# EAGLE board Schematic v32 (EAGLE 9.7.0)
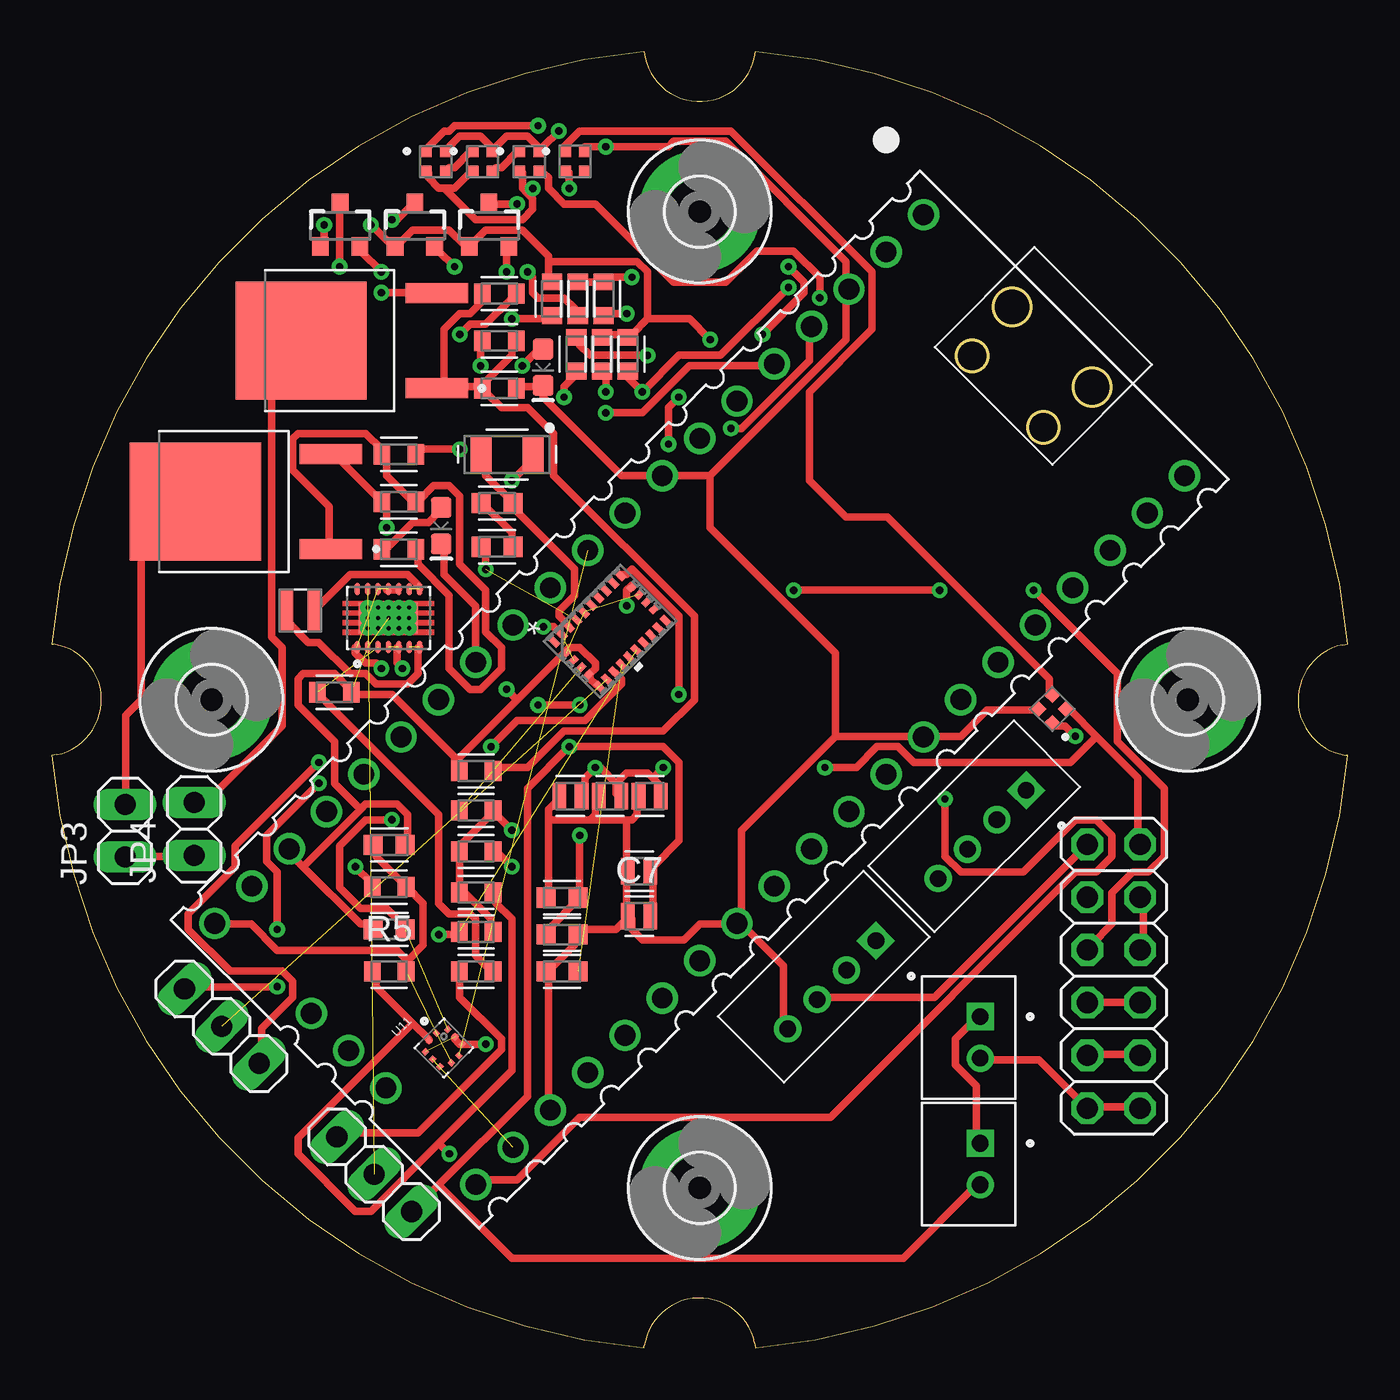
[diagram p0: board, top side]
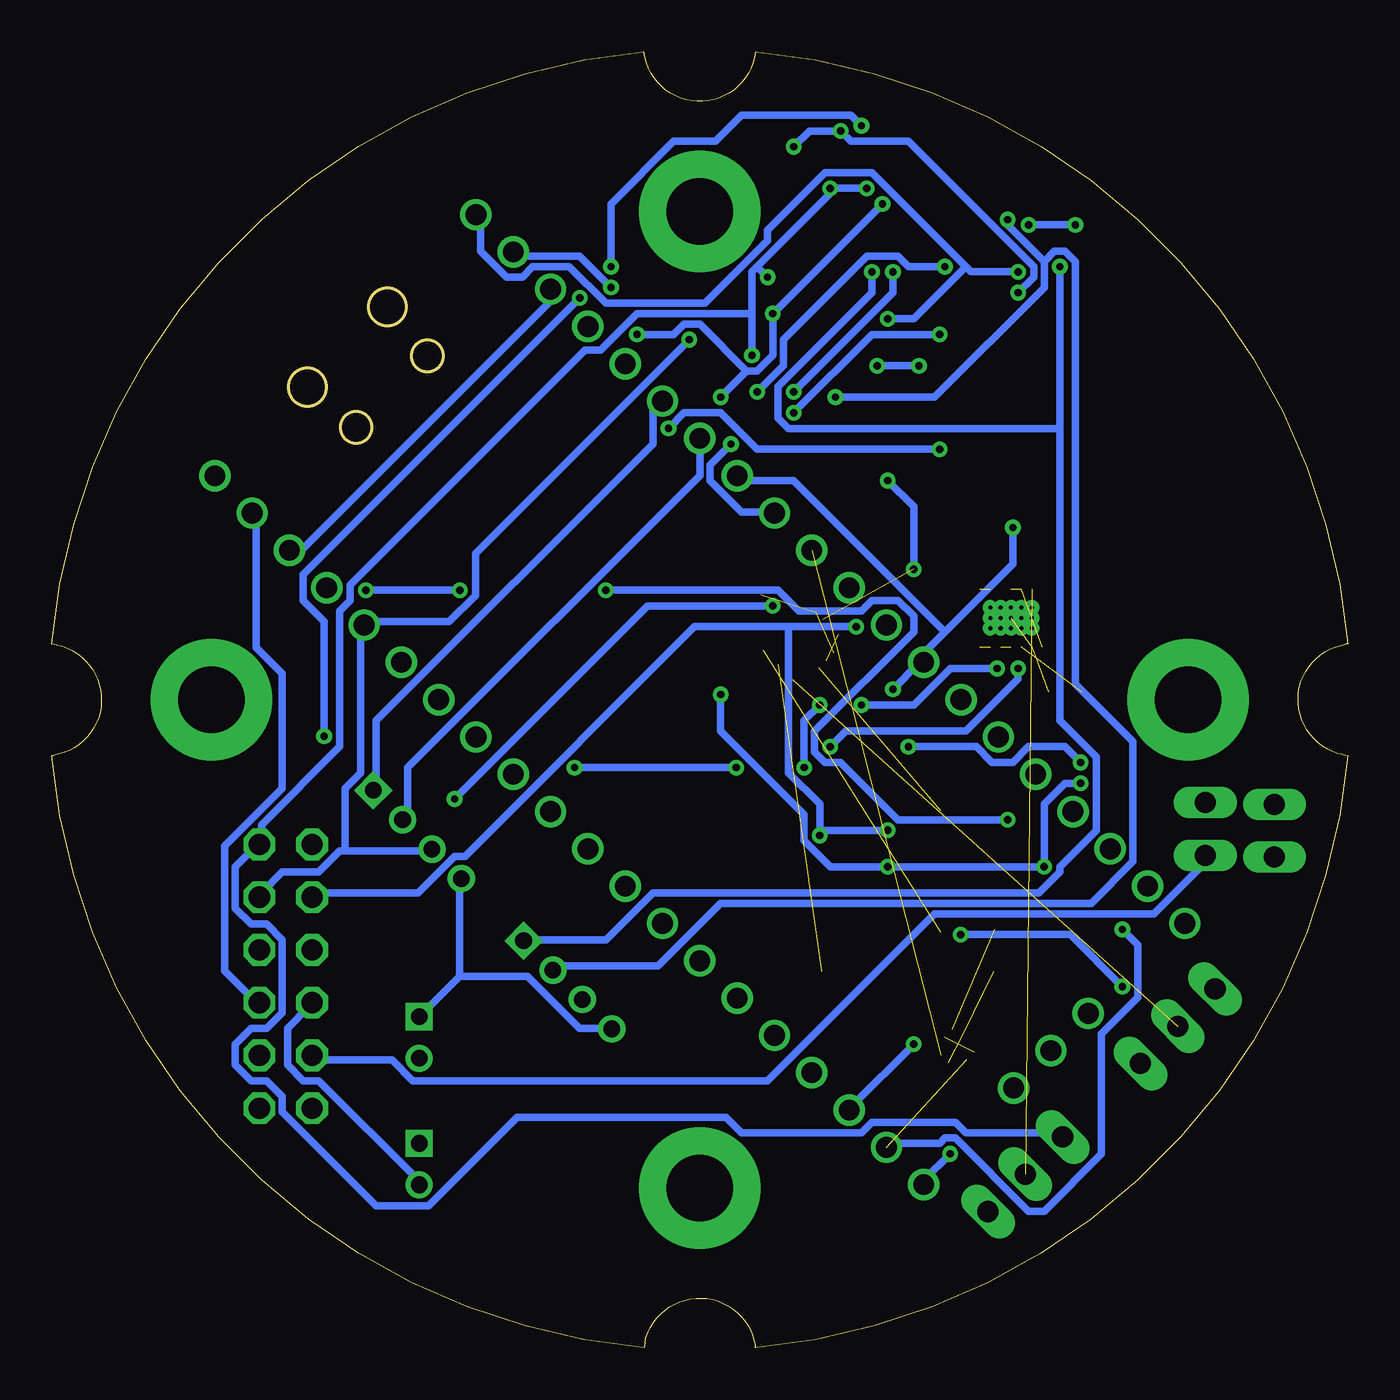
[diagram p1: board, bottom side, seen from below]

Size 62.37 x 62.37 mm. Coordinates in mm from the lower left corner, seen from the top.
Outline: 28.5,62.37 arc80 0,33.87 0.07,33.86 arc-160 0.23,28.54 0,28.5 arc80 28.5,0 28.51,0.07 arc-160 33.83,0.23 33.87,0 arc80 62.37,28.5 62.29,28.51 arc-160 62.14,33.83 62.37,33.87 arc80 33.87,62.37 arc-167 28.5,62.37
Outline: circle at 47.72,44.3 radius 0.75
Outline: circle at 50.08,46.23 radius 0.9
Outline: circle at 44.29,47.73 radius 0.75
Outline: circle at 46.22,50.09 radius 0.9
Copper layers (1+2*15+16): Top 0.035mm / dielectric 1.5mm / Route2 0.035mm / dielectric 0.15mm / Route15 0.035mm / dielectric 0.2mm / Bottom 0.035mm
Design rules "default *": minimum track width 0.35mm, minimum drill 0.35mm, track to track 6mil, track to pad 6mil, pad to pad 6mil, via to via 6mil, smd to smd 6mil, copper to edge 40mil, drill to drill 6mil, minimum pad ring 10mil, minimum via ring 8mil, stop-mask expansion 4mil, vias tented up to drill 0mil, thermal gap 10mil

## Footprints (pad centres in the part's own frame; a part is rotated, then mirrored left to right if it is on the bottom)
CAPC1608X85 = smd 0.921 x 0.97: 1 -0.775,0; 2 0.775,0
CAPC1110X102 = smd 0.663 x 1.282: 1 -0.539,0; 2 0.539,0
LED-0603 = smd 1 x 1: A -0.877,0; C 0.877,0
3,2-PAD = drill 3.2 pad 5.842: B3,2 0,0
JST_B4B-PH-KL(LF)(SN) = drill 0.8 square: 1 3,-0.55 | drill 0.8: 2 1,-0.55; 3 -1,-0.55; 4 -3,-0.55
JST_B2B-PH-K-S(LF)(SN) = drill 0.8 square: 1 1,-0.55 | drill 0.8: 2 -1,-0.55
1X03 = drill 1.016 long: 1 -2.54,0; 2 0,0; 3 2.54,0
1X02 = drill 1.016 long: 1 -1.27,0; 2 1.27,0
2X06 = drill 1.016 octagon: 1 -6.35,-1.27; 2 -6.35,1.27; 3 -3.81,-1.27; 4 -3.81,1.27; 5 -1.27,-1.27; 6 -1.27,1.27; 7 1.27,-1.27; 8 1.27,1.27; 9 3.81,-1.27; 10 3.81,1.27; 11 6.35,-1.27; 12 6.35,1.27
INDUCTOR_2X2 = smd 0.65 x 2: P$1 -0.675,0; P$2 0.675,0
SOT23-3 = smd 0.8 x 0.9: 1 -0.95,-1; 2 0.95,-1; 3 0,1.1
DPAK228P994X240-4N = smd 0.97 x 3.02: 1 -2.286,-4.09; 3 2.286,-4.09 | smd 5.67 x 6.32: 4 0,2.44
RESC1608X60 = smd 0.799 x 0.974: 1 -0.815,0; 2 0.815,0
QFN_BNO055_BOS = smd 0.305 x 0.533: 1 -2.25,1.537; 6 -2.25,-1.537; 7 -1.75,-1.537; 8 -1.25,-1.537; 9 -0.75,-1.537; 10 -0.25,-1.537; 11 0.25,-1.537; 12 0.75,-1.537; 13 1.25,-1.537; 14 1.75,-1.537; 15 2.25,-1.537; 20 2.25,1.537; 21 1.75,1.537; 22 1.25,1.537; 23 0.75,1.537; 24 0.25,1.537; 25 -0.25,1.537; 26 -0.75,1.537; 27 -1.25,1.537; 28 -1.75,1.537 | smd 0.432 x 0.305: 2 -2.235,0.75; 3 -2.235,0.25; 4 -2.235,-0.25; 5 -2.235,-0.75; 16 2.235,-0.75; 17 2.235,-0.25; 18 2.235,0.25; 19 2.235,0.75
PICO-PKG-TH = drill 1: 1 -8.89,24.13; 2 -8.89,21.59; 3 -8.89,19.05; 4 -8.89,16.51; 5 -8.89,13.97; 6 -8.89,11.43; 7 -8.89,8.89; 8 -8.89,6.35; 9 -8.89,3.81; 10 -8.89,1.27; 11 -8.89,-1.27; 12 -8.89,-3.81; 13 -8.89,-6.35; 14 -8.89,-8.89; 15 -8.89,-11.43; 16 -8.89,-13.97; 17 -8.89,-16.51; 18 -8.89,-19.05; 19 -8.89,-21.59; 20 -8.89,-24.13; 21 8.89,-24.13; 22 8.89,-21.59; 23 8.89,-19.05; 24 8.89,-16.51; 25 8.89,-13.97; 26 8.89,-11.43; 27 8.89,-8.89; 28 8.89,-6.35; 29 8.89,-3.81; 30 8.89,-1.27; 31 8.89,1.27; 32 8.89,3.81; 33 8.89,6.35; 34 8.89,8.89; 35 8.89,11.43; 36 8.89,13.97; 37 8.89,16.51; 38 8.89,19.05; 39 8.89,21.59; 40 8.89,24.13; 41 -2.54,-23.9; 42 0,-23.9; 43 2.54,-23.9 | hole 1.8: -2.725,24; 2.725,24 | hole 1.5: -2.425,20.97; 2.425,20.97
LED_4492 = smd 0.55 x 0.55: 1 -0.475,0.475; 2 -0.475,-0.475; 3 0.475,-0.475; 4 0.475,0.475
IC_TPS63020DSJR = smd 0.6 x 0.24: 1 -1.4,1.5; 2 -1.4,1; 3 -1.4,0.5; 4 -1.4,0; 5 -1.4,-0.5; 6 -1.4,-1; 7 -1.4,-1.5; 8 1.4,-1.5; 9 1.4,-1; 10 1.4,-0.5; 11 1.4,0; 12 1.4,0.5; 13 1.4,1; 14 1.4,1.5 | smd 1.5 x 2.8: 15 0,0 | drill 0.2 pad 0.3: 16 -0.5,1; 17 0,1; 18 0.5,1; 19 -0.5,0.5; 20 0,0.5; 21 0.5,0.5; 22 -0.5,0; 23 0,0; 24 0.5,0; 25 -0.5,-0.5; 26 0,-0.5; 27 0.5,-0.5; 28 -0.5,-1; 29 0,-1; 30 0.5,-1
XDCR_BMP390L = smd 0.25 x 0.275: 1 0.25,0.762; 2 -0.25,0.762; 6 -0.25,-0.762; 7 0.25,-0.762 | smd 0.275 x 0.25: 3 -0.762,0.5; 4 -0.762,0; 5 -0.762,-0.5; 8 0.762,-0.5; 9 0.762,0; 10 0.762,0.5
XTAL330X1051X90N = smd 1 x 1.8: 1 -1.25,0; 2 1.25,0

## Placement (x,y rotation side)
C1  1μF  [CAPC1608X85]  24.55,18.1 0 top
C2  100nF  [CAPC1608X85]  24.55,21.66 0 top
C3  120nF  [CAPC1608X85]  24.55,19.88 0 top
C4  100nF  [CAPC1608X85]  16.23,20.14 180 top
C5  100nF  [CAPC1608X85]  16.23,24.2 0 top
C6  10n  [CAPC1110X102]  28.26,22.93 0 top
C7  100n  [CAPC1110X102]  28.26,20.77 0 top
C8  22UF  [CAPC1110X102]  28.77,26.55 0 top
C9  22uF  [CAPC1110X102]  26.87,26.55 0 top
C10  22UF  [CAPC1110X102]  24.96,26.55 0 top
C11  120nF  [CAPC1608X85]  21.43,40.66 180 top
C12  120nF  [CAPC1608X85]  21.43,38.55 0 top
D1  Red  [LED-0603]  18.74,39.57 270 top
D2  Red  [LED-0603]  23.64,47.19 270 top
H1  MOUNT-PAD-ROUND3.2  [3,2-PAD]  31.18,7.68 0 top
H2  MOUNT-PAD-ROUND3.2  [3,2-PAD]  54.68,31.18 0 top
H3  MOUNT-PAD-ROUND3.2  [3,2-PAD]  31.18,54.68 0 top
H4  MOUNT-PAD-ROUND3.2  [3,2-PAD]  7.68,31.18 0 top
J1  B4B-PH-KL(LF)(SN)  [JST_B4B-PH-KL(LF)(SN)]  44.39,25.09 45 top
J2  B4B-PH-KL(LF)(SN)  [JST_B4B-PH-KL(LF)(SN)]  37.15,17.85 45 top
J3  B2B-PH-K-S(LF)(SN)  [JST_B2B-PH-K-S(LF)(SN)]  44.14,8.83 90 top
J4  B2B-PH-K-S(LF)(SN)  [JST_B2B-PH-K-S(LF)(SN)]  44.14,14.93 90 top
JP1  PINHD-1X3  [1X03]  15.51,8.34 135 top
JP2  PINHD-1X3  [1X03]  8.17,15.47 135 top
JP3  PINHD-1X2  [1X02]  3.52,24.88 90 top
JP4  PINHD-1X2  [1X02]  6.85,24.96 90 top
JP5  PINHD-2X6  [2X06]  51.11,17.87 270 top
L1  1.5uH  [INDUCTOR_2X2]  11.95,35.48 180 top
Q1  220mA/50V/3.5Ω  [SOT23-3]  17.47,54 0 top
Q2  220mA/50V/3.5Ω  [SOT23-3]  13.87,54 0 top
Q3  220mA/50V/3.5Ω  [SOT23-3]  21.04,54 0 top
Q4  AOD4184A  [DPAK228P994X240-4N]  9.34,40.72 90 top
Q5  AOD4184A  [DPAK228P994X240-4N]  14.43,48.47 90 top
R1  10K  [RESC1608X60]  20.42,25.85 0 top
R2  4.7K  [RESC1608X60]  20.42,23.88 0 top
R3  4.7K  [RESC1608X60]  20.42,21.91 0 top
R4  10K  [RESC1608X60]  20.42,20.01 0 top
R5  4.7K  [RESC1608X60]  16.23,18.1 0 top
R6  4.7K  [RESC1608X60]  16.23,22.17 0 top
R7  10K  [RESC1608X60]  24.07,50.49 90 top
R8  10K  [RESC1608X60]  25.31,50.49 90 top
R9  10K  [RESC1608X60]  26.55,50.49 90 top
R10  10K  [RESC1608X60]  25.25,47.82 90 top
R11  10K  [RESC1608X60]  26.48,47.82 90 top
R12  10K  [RESC1608X60]  27.72,47.82 90 top
R13  [RESC1608X60]  20.42,27.76 0 top
R14  [RESC1608X60]  20.42,18.1 0 top
R15  [RESC1608X60]  16.71,38.42 0 top
R16  [RESC1608X60]  16.71,40.71 0 top
R17  [RESC1608X60]  16.71,43 0 top
R18  [RESC1608X60]  21.53,48.46 0 top
R19  [RESC1608X60]  21.53,46.17 180 top
R20  [RESC1608X60]  21.53,50.74 0 top
R21  [RESC1608X60]  13.6,31.55 0 top
U1  BNO055QFN_BNO055_BOS  [QFN_BNO055_BOS]  26.87,34.49 45 top
U2  RASPBERRY_PICOTH  [PICO-PKG-TH]  31.18,31.19 315 top
U3  4492  [LED_4492]  18.48,57.09 0 top
U4  4492  [LED_4492]  20.73,57.09 0 top
U5  4492  [LED_4492]  22.98,57.09 0 top
U6  4492  [LED_4492]  48.15,30.74 135 top
U7  4492  [LED_4492]  25.18,57.09 0 top
U8  TPS63020DSJR  [IC_TPS63020DSJR]  16.2,35.12 90 top
U11  BMP390L  [XDCR_BMP390L]  18.87,14.42 45 top
XTAL1  32.768 kHz  [XTAL330X1051X90N]  21.91,43 180 top

## Library data of the parts
C1-C12 = Capacitor; CATEGORY: Capacitor
D1 D2 = SparkFun-LED; PROD_ID: DIO-16511
H1-H4 = holes
J1 J2 = JST Sales B4B-PH-KL footprint; AVAILABILITY: In Stock; CHECK_PRICES: https://www.snapeda.com/parts/B4B-PH-KL(LF)(SN)/JST+Sales+America+Inc./view-part/?ref=eda; DESCRIPTION: Connector Header Through Hole 4 position 0.079 (2.00mm); MF: JST Sales; MP: B4B-PH-KL(LF)(SN); PACKAGE: None; PRICE: None; SNAPEDA_LINK: https://www.snapeda.com/parts/B4B-PH-KL(LF)(SN)/JST+Sales+America+Inc./view-part/?ref=snap
J3 J4 = JST Sales B2B-PH-K-S footprint; AVAILABILITY: In Stock; CHECK_PRICES: https://www.snapeda.com/parts/B2B-PH-K-S(LF)(SN)/JST+Sales+America+Inc./view-part/?ref=eda; DESCRIPTION: Connector Header Through Hole 2 position 0.079 (2.00mm); MF: JST Sales; MP: B2B-PH-K-S(LF)(SN); PACKAGE: None; PRICE: None; SNAPEDA_LINK: https://www.snapeda.com/parts/B2B-PH-K-S(LF)(SN)/JST+Sales+America+Inc./view-part/?ref=snap
JP1 JP2 = Connector; CATEGORY: Headers; DESCRIPTION: Header, Straight, 3 Position; MANUFACTURER: Generic; MPN: Generic; OPERATING_TEMPERATURE: Generic; PART_STATUS: Active; PITCH: 0.100" (2.54mm); ROHS_COMPLIANCE: Generic; SERIES: Generic; SUB-CATEGORY: Headers, Male Pins; TYPE: Board to Board or Cable, Unshrouded, Through Hole, Straight
JP3 JP4 = Connector; CATEGORY: Headers; DESCRIPTION: Header, Straight, 2 Position; MANUFACTURER: Generic; MPN: Generic; OPERATING_TEMPERATURE: Generic; PART_STATUS: Active; PITCH: 0.100" (2.54mm); ROHS_COMPLIANCE: Generic; SERIES: Generic; SUB-CATEGORY: Headers, Male Pins; TYPE: Board to Board or Cable, Unshrouded, Through Hole, Straight
JP5 = Connector; CATEGORY: Headers; DESCRIPTION: Header, Straight, 2x6 Position; MANUFACTURER: Generic; MPN: Generic; OPERATING_TEMPERATURE: Generic; PART_STATUS: Active; PITCH: 0.100" (2.54mm); ROHS_COMPLIANCE: Generic; SERIES: Generic; SUB-CATEGORY: Headers, Male Pins; TYPE: Board to Board or Cable, Unshrouded, Through Hole, Straight
L1 = SparkFun-Coils; PROD_ID: NDUC-15405
Q1-Q3 = SparkFun-DiscreteSemi; PROD_ID: TRANS-00830
Q4 Q5 = AOD4184A footprint; AVAILABILITY: In Stock; CHECK_PRICES: https://www.snapeda.com/parts/AOD4184A/Alpha+%2526+Omega+Semiconductor+Inc./view-part/?ref=eda; DESCRIPTION: N-Channel 40 V 13A (Ta), 50A (Tc) 2.3W (Ta), 50W (Tc) Surface Mount TO-252 (DPAK); MF: Alpha & Omega Semiconductor Inc.; MP: AOD4184A; PACKAGE: None; PRICE: None; SNAPEDA_LINK: https://www.snapeda.com/parts/AOD4184A/Alpha+%2526+Omega+Semiconductor+Inc./view-part/?ref=snap
R1-R21 = Resistor; CATEGORY: Resistor; SUB-CATEGORY: Fixed
U1 = 2024-07-31_17-07-40_Library; COPYRIGHT: Copyright (C) 2024 Ultra Librarian. All rights reserved.; MANUFACTURER_PART_NUMBER: BNO055; MFR_NAME: Bosch Sensortec
U2 = RPI Pico Eagle lib
U3-U7 = Adafruit 4492; AVAILABILITY: In Stock; CHECK_PRICES: https://www.snapeda.com/parts/4492/Adafruit+Industries/view-part/?ref=eda; DESCRIPTION: Adafruit Accessories NeoPixel Addressable 1515 LEDs (1.5mm x 1.5mm) - 10 pack - SK6805-E-J; MF: Adafruit; MP: 4492; PACKAGE: None; PRICE: None; PURCHASE-URL: https://www.snapeda.com/api/url_track_click_mouser/?unipart_id=6292704&manufacturer=Adafruit&part_name=4492&search_term=neopixel; SNAPEDA_LINK: https://www.snapeda.com/parts/4492/Adafruit+Industries/view-part/?ref=snap
U8 = TPS63020DSJR Texas Instruments; AVAILABILITY: In Stock; CHECK_PRICES: https://www.snapeda.com/parts/TPS63020DSJR/Texas+Instruments/view-part/?ref=eda; DESCRIPTION: High Efficiency Single Inductor Buck-Boost Converter with 4A Switch; MF: Texas Instruments; MP: TPS63020DSJR; PACKAGE: VSON-14 Texas Instruments; PRICE: None; PURCHASE-URL: https://www.snapeda.com/api/url_track_click_mouser/?unipart_id=296571&manufacturer=Texas Instruments&part_name=TPS63020DSJR&search_term=None; SNAPEDA_LINK: https://www.snapeda.com/parts/TPS63020DSJR/Texas+Instruments/view-part/?ref=snap
U11 = BMP390L footprint symbol; AVAILABILITY: In Stock; CHECK_PRICES: https://www.snapeda.com/parts/BMP390L/Bosch+Sensortec/view-part/?ref=eda; DESCRIPTION: Pressure Sensor Development Tools Evaluation Shuttle Board for the BMP390L; MF: Bosch Sensortec; MP: BMP390L; PACKAGE: None; PRICE: None; PURCHASE-URL: https://www.snapeda.com/api/url_track_click_mouser/?unipart_id=4817101&manufacturer=Bosch Sensortec&part_name=BMP390L&search_term=bmp390; SNAPEDA_LINK: https://www.snapeda.com/parts/BMP390L/Bosch+Sensortec/view-part/?ref=snap
XTAL1 = Frequency-Source; DESCRIPTION: kHz RANGE CRYSTAL UNIT; FREQUENCY: 32.768 kHz; MANUFACTURER: Seiko Epson Corporation; MPN: FC-135; OPERATING_TEMPERATURE: -40°C to 85°C; PART_STATUS: Active; ROHS_COMPLIANT: COMPLIANT; SERIES: FC - 135; SUB_CATEGORY: CRYSTAL; TYPE: CRYSTAL

## Nets
BMP390_INT: U2.10 U11.7
BMP390_MODE_SEL: C5.1 R5.2 R6.2 U2.20 U11.1 U11.6
GND: C1.1 C2.1 C3.2 C4.2 C5.2 C6.1 C7.1 C8.1 C9.1 C10.1 D1.C D2.C J1.4 J2.4 J3.1 J4.1 Q4.3 Q5.3 R13.1 R16.1 R19.1 R21.2 U1.2 U1.5 U1.6 U1.18 U1.25 U2.3 U2.8 U2.13 U2.18 U2.23 U2.28 U2.33 U2.38 U3.4 U4.4 U5.4 U6.4 U7.4 U8.2 U8.15 U11.3 U11.8 U11.9
HV_DATA_NEOPIXEL: Q3.3 R9.1 U2.9 U3.1
HV_RX_ELRS: J2.1 Q2.3 R8.1
HV_TX_ELRS: J2.2 Q1.3 R10.1
LV_DATA_NEOPIXEL: Q3.2 R11.1
LV_RX_ELRS: Q2.2 R7.1 U2.1
LV_TX_ELRS: Q1.2 R12.1 U2.2
N$1: C1.2 U1.9
N$2: R1.1 U1.4
N$3: L1.P$1 U8.8 U8.9
N$4: U3.3 U4.1
N$5: U4.3 U5.1
N$6: U5.3 U6.1
N$7: U6.3 U7.1
N$8: L1.P$2 U8.6 U8.7
N$9: R14.2 R21.1 U8.3
N$10: JP1.2 U8.13
N$11: Q4.1 R15.2 R16.2 R17.1
N$12: D1.A R15.1
N$13: JP3.2 Q4.4
N$14: Q5.1 R13.2 R18.2 R19.2 R20.1
N$15: D2.A R18.1
N$16: JP4.2 Q5.4
N$22: C12.1 U1.26 XTAL1.1
N$23: C11.1 U1.27 XTAL1.2
N$24: C11.2 C12.2
NRESET: JP2.3 R4.1 U1.11
RX_GPS: J1.1 U2.6
SCL: R3.2 R5.1 U1.19 U2.21 U11.2
SDA: R2.2 R6.1 U1.20 U2.22 U11.4
SWCLK_BNO055: JP2.1 U1.8
SWDIO_BNO055: JP2.2 U1.7
SWGND: U2.42
TRIG_CHARGE_1: R17.2 U2.4
TRIG_CHARGE_2: R20.2 U2.5
TX_GPS: J1.2 U2.7
VBUS: U2.40
VCC_3_3: J1.3 JP5.4 JP5.6 Q1.1 Q2.1 Q3.1 R7.2 R11.2 R12.2 U2.36
VCC_3_3_BMP390L: C4.1 JP5.5 U11.10
VCC_3_3_BNO055: C2.2 C3.1 JP5.3 R1.2 R2.1 R3.1 R4.2 U1.3 U1.28
VCC_5: C8.2 C9.2 C10.2 JP1.3 JP5.2 R8.2 R9.2 R10.2 R14.1 U3.2 U4.2 U5.2 U6.2 U7.2 U8.4 U8.5
VCC_5_ELRS: J2.3 JP5.1
VCC_CHARGES: JP3.1 JP4.1 JP5.9 JP5.10
VCC_IN: C6.2 C7.2 J3.2 JP1.1 JP5.7 JP5.8 U2.39 U8.1 U8.10 U8.11 U8.12
VCC_IN_CHARGES: J4.2 JP5.11 JP5.12

## Tracks (layer width: path | path; a pad name or v marks a point on that pad's centre or on a via)
BMP390_INT  (1 unrouted)
BMP390_MODE_SEL  (2 unrouted)
  Top 0.35: C5.1 15.61,24.15 15.61,23.65 16.87,22.39 R6.2 17.12,22.14 17.87,21.39 17.87,19.38 17.12,18.62 | 17.12,18.62 17.12,18.12 R5.2 | 17.12,18.62 16.61,19.13 10.84,19.13 9.58,20.38 8.07,20.38 U2.20
GND  (via drill 0.35)  (5 unrouted)
  Top 0.35: U11.9 19.38,14.86 19.63,14.61 U11.8 19.88,14.61 v20.89,14.61 | C7.1 27.67,20.89 27.67,22.89 C6.1 27.67,23.15 27.67,25.41 | 23.9,25.41 23.9,25.91 24.4,26.41 C10.1 | 23.9,25.41 23.9,21.89 C2.1 | 25.91,25.41 26.16,25.66 26.16,26.41 C9.1 | 23.9,25.41 25.91,25.41 | 25.91,25.41 27.67,25.41 | 27.67,25.41 27.92,25.41 28.17,25.66 28.17,26.41 C8.1 | C7.1 27.67,20.63 27.17,20.13 25.41,20.13 C3.2 25.16,19.88 25.16,19.38 23.9,18.12 C1.1 23.9,17.87 23.9,11.59 U2.23 | J3.1 44.5,9.83 44.5,12.6 43.49,13.6 43.49,14.86 44.5,15.86 J4.1 | U6.4 47.26,30.68 45,30.68 43.74,29.43 41.99,29.43 U2.33 41.73,29.43 37.72,29.43 | J2.4 35.2,15.36 35.2,18.37 33.19,20.38 U2.28 | 37.72,29.43 33.19,24.9 33.19,20.63 U2.28 | C7.1 27.92,20.63 27.92,20.13 28.42,19.63 30.43,19.63 31.18,20.38 32.94,20.38 U2.28 | 12.09,23.15 11.34,23.9 U2.18 | 12.09,23.15 14.86,20.38 15.36,20.38 C4.2 | 12.09,23.15 14.86,25.91 | 14.86,25.91 15.11,26.16 16.61,26.16 17.12,25.66 17.12,24.4 C5.2 | 25.91,32.44 25.91,32.19 26.16,31.94 U1.6 | 24.65,33.45 24.9,33.7 25.41,33.7 26.16,32.94 26.16,32.69 25.91,32.44 | 25.91,32.44 U1.5 | 19.38,28.17 19.38,27.92 R13.1 19.38,28.17 | 19.38,28.17 19.38,28.42 16.36,31.44 14.61,31.44 R21.2 14.35,31.69 13.6,32.44 12.09,32.44 11.84,32.19 11.84,30.93 13.6,29.17 13.6,27.17 14.86,25.91 | 19.38,28.17 22.39,31.18 | 22.39,31.18 24.65,33.45 | 24.65,33.45 U1.2 | R19.1 22.39,46.26 23.4,46.26 D2.C 23.65,46.26 23.65,45.75 27.42,41.99 29.17,41.99 U2.8 29.43,41.99 31.69,41.99 | Q4.3 13.6,42.99 15.86,40.73 R16.1 16.11,40.48 v16.11,39.47 | D1.C 18.88,38.47 18.88,37.21 20.38,35.71 20.38,33.19 U2.13 | v21.89,31.69 22.39,31.18
  Top 0.35: U3.4 19.13,57.81 19.63,58.31 20.63,58.31 21.14,57.81 U4.4 21.39,57.81 21.89,58.31 22.89,58.31 23.4,57.81 U5.4 23.65,57.81 v24.4,58.57 | U7.4 25.66,57.81 v26.66,57.81 29.68,57.81 29.93,58.06 32.44,58.06 38.22,52.29 38.22,51.03 U2.3 38.22,50.78 38.22,48.52 31.69,41.99 | v15.86,50.78 18.37,50.78 Q5.3 | 37.72,29.43 37.72,33.45 31.69,39.47 31.69,41.99
  Bottom 0.35: v20.89,14.61 23.9,11.59 U2.23 | 42.74,17.87 42.74,22.39 J1.4 | 42.74,17.87 44.5,16.11 J4.1 | 42.74,17.87 39.47,17.87 36.96,15.36 35.45,15.36 J2.4 | v16.11,39.47 16.11,37.72 19.38,34.45 | 19.38,34.45 20.63,33.19 U2.13 20.63,32.94 v21.89,31.69 | 19.38,34.45 26.66,41.73 29.17,41.73 U2.8 | v26.66,57.81 25.91,58.57 v24.4,58.57 23.9,58.06 21.14,58.06 15.11,52.03 15.11,51.53 v15.86,50.78 | U2.38 50.78,38.47 50.28,38.47 38.47,50.28 38.47,50.78 U2.3
HV_DATA_NEOPIXEL  (via drill 0.35)
  Top 0.35: v23.4,58.82 19.38,58.82 19.13,58.57 18.88,58.57 18.12,57.81 U3.1 | v35.45,52.03 36.21,51.28 36.21,50.78 v34.2,48.77 | v27.67,49.77 26.66,49.77 R9.1 | v22.39,55.05 21.14,55.05 Q3.3 | v29.68,43.49 29.68,45.25 v30.18,45.75
  Bottom 0.35: v23.4,58.82 23.9,59.32 29.17,59.32 30.43,58.06 32.44,58.06 35.45,55.05 v35.45,52.03 | v34.2,48.77 32.44,48.77 31.94,49.27 31.18,49.27 28.92,47.01 | 28.92,47.01 28.42,47.01 27.67,47.76 v27.67,49.77 v22.39,55.05 | v29.68,43.49 30.68,42.49 30.68,41.73 29.17,40.23 27.67,40.23 U2.9 | 28.92,47.01 v30.18,45.75
HV_RX_ELRS  (via drill 0.35)
  Top 0.35: v13.85,52.03 13.85,55.05 Q2.3 | v22.89,51.78 23.15,51.53 23.15,50.78 23.4,50.53 24.65,50.53 25.16,50.02 25.16,49.77 R8.1
  Bottom 0.35: 13.85,44.25 13.85,30.18 12.09,28.42 12.09,24.9 13.85,23.15 13.85,22.89 14.86,21.89 33.45,21.89 35.71,19.63 39.47,19.63 J2.1 | 13.85,44.25 v13.85,52.03 | v22.89,51.78 22.89,50.78 27.42,46.26 27.42,44.75 26.91,44.25 13.85,44.25
HV_TX_ELRS  (via drill 0.35)
  Top 0.35: v16.36,54.29 16.61,54.29 17.37,55.05 Q1.3 | v24.65,45.75 24.65,46.26 25.16,46.76 R10.1
  Bottom 0.35: v16.36,54.29 16.36,54.04 14.61,52.29 | 14.61,52.29 14.61,51.03 19.88,45.75 v24.65,45.75 | 14.61,52.29 14.1,52.79 13.6,52.79 13.1,52.29 13.1,31.94 10.33,29.17 10.33,23.4 12.34,21.39 30.18,21.39 33.19,18.37 38.22,18.37 J2.2
LV_DATA_NEOPIXEL  (via drill 0.35)
  Top 0.35: v21.89,51.78 21.89,52.79 Q3.2 | v26.66,46.01 26.66,46.76 R11.1
  Bottom 0.35: v21.89,51.78 21.89,50.78 v26.66,46.01
LV_RX_ELRS  (via drill 0.35)
  Top 0.35: v15.86,51.78 14.86,52.79 Q2.2 | v22.14,49.52 23.9,49.52 R7.1
  Bottom 0.35: v15.86,51.78 18.12,51.78 18.37,52.03 | 18.37,52.03 22.89,56.56 25.16,56.56 27.92,53.79 27.92,53.29 30.93,50.28 35.71,50.28 37.46,52.03 39.22,52.03 39.73,51.53 40.48,51.53 41.73,52.79 41.73,54.29 U2.1 | v22.14,49.52 20.89,49.52 18.37,52.03
LV_TX_ELRS  (via drill 0.35)
  Top 0.35: v19.38,52.03 18.62,52.79 Q1.2 | R12.1 27.67,46.76 v28.42,46.01 30.18,47.76 32.19,47.76 v35.45,51.03
  Bottom 0.35: v19.38,52.03 21.14,52.03 21.64,52.54 23.15,52.54 27.17,48.52 27.17,47.26 v28.42,46.01 | v35.45,51.03 36.96,52.54 39.98,52.54 U2.2
N$1  (1 unrouted)
N$2  (1 unrouted)
N$3  (1 unrouted)
  Top 0.35: U8.8 17.62,36.71 17.12,37.21 14.35,37.21 12.85,35.71 L1.P$1
N$4
  Top 0.35: U3.3 19.13,56.81 19.38,56.81 20.13,57.56 U4.1
N$5
  Top 0.35: U4.3 21.39,56.81 21.64,56.81 22.39,57.56 U5.1
N$6  (via drill 0.35)
  Top 0.35: v49.27,29.43 48.77,29.93 48.27,29.93 U6.1 | v36.96,50.53 36.96,51.53 35.71,52.79 33.95,52.79 32.44,51.28 29.93,51.28 26.16,55.05 24.65,55.05 23.9,55.8 23.9,56.3 23.65,56.56 U5.3
  Bottom 0.35: v49.27,29.43 49.27,34.95 50.28,35.96 50.28,37.21 v36.96,50.53
N$7
  Top 0.35: U6.3 48.01,31.44 48.01,32.19 40.23,39.98 38.22,39.98 36.46,41.73 36.46,46.01 39.47,49.02 39.47,51.78 32.69,58.57 25.41,58.57 24.65,57.81 U7.1
N$8  (1 unrouted)
  Top 0.35: U8.7 17.62,33.7 17.62,32.44 17.12,31.94 15.61,31.94 15.11,32.44 14.35,32.44 12.85,33.95 12.34,33.95 11.34,34.95 11.34,35.45 L1.P$2
N$9  (1 unrouted)
  Top 0.35: R21.1 12.85,31.44 18.62,25.66 18.62,21.39 19.13,20.89 20.13,20.89 20.38,20.63 20.38,18.88 21.14,18.12 R14.2
N$10  (1 unrouted)
N$11
  Top 0.35: R15.2 17.62,38.22 17.62,37.72 19.13,36.21 19.13,32.69 20.13,31.69 20.63,31.69 21.64,32.69 21.64,33.7 20.89,34.45 20.89,36.46 19.63,37.72 19.63,40.98 19.13,41.48 18.37,41.48 17.62,40.73 R16.2 17.37,40.73 16.11,41.99 16.11,42.99 R17.1 15.86,43.24 15.11,44 11.84,44 11.59,43.74 11.59,42.24 13.35,40.48 13.35,38.47 Q4.1
N$12
  Top 0.35: R15.1 16.11,38.47 17.37,39.73 18.12,39.73 18.62,40.23 D1.A
N$13
  Top 0.35: JP3.2 3.55,26.16 3.55,30.43 4.31,31.18 4.31,37.97 6.82,40.48 Q4.4
N$14
  Top 0.35: 18.88,46.26 18.62,46.26 Q5.1 18.88,46.26 | 18.88,46.26 20.63,46.26 | 18.88,46.26 18.88,49.02 19.63,49.77 20.13,49.77 20.63,50.28 20.63,50.53 R20.1 | R13.2 21.39,27.92 22.89,27.92 24.65,29.68 29.43,29.68 30.93,31.18 30.93,35.2 24.15,41.99 24.15,44 22.89,45.25 21.64,45.25 20.89,46.01 R19.2 20.63,46.26 | 20.63,46.26 22.14,47.76 22.14,48.27 R18.2
N$15  (via drill 0.35)
  Top 0.35: v20.63,47.26 20.63,48.27 R18.1 | v22.64,47.26 23.4,48.01 D2.A
  Bottom 0.35: v22.64,47.26 v20.63,47.26
N$16
  Top 0.35: JP4.2 7.07,26.41 7.57,26.41 11.09,29.93 11.09,33.7 10.59,34.2 10.59,47.01 11.84,48.27 Q5.4
N$22  (via drill 0.35)  (1 unrouted)
  Top 0.35: v20.89,37.46 20.89,38.47 C12.1 | v22.14,41.73 23.4,42.99 XTAL1.1
  Bottom 0.35: v20.89,37.46 20.89,40.48 v22.14,41.73
N$23
  Top 0.35: U1.27 24.9,34.7 24.4,35.2 24.4,35.45 25.16,36.21 25.16,37.46 22.14,40.48 C11.1 22.14,40.73 20.89,41.99 20.89,42.99 XTAL1.2
N$24
  Top 0.35: C12.2 22.14,38.72 22.14,39.22 20.89,40.48 C11.2
NRESET  (via drill 0.35)  (1 unrouted)
  Top 0.35: v18.62,19.88 19.38,19.88 R4.1 | v10.84,17.37 6.57,17.37 JP2.3
  Bottom 0.35: v18.62,19.88 13.35,19.88 v10.84,17.37
RX_GPS
  Bottom 0.35: J1.1 46.76,26.91 46.76,30.18 33.45,43.49 33.45,45.25 33.19,45.5 U2.6
SCL  (via drill 0.35)
  Top 0.35: 17.37,15.61 15.61,17.37 15.61,17.87 R5.1 | 17.37,15.61 18.12,14.86 U11.2 | 18.62,9.83 15.36,6.57 14.61,6.57 11.84,9.33 11.84,10.08 17.37,15.61 | 18.62,9.83 22.14,13.35 22.14,20.63 21.39,21.39 21.39,21.89 R3.2 | v27.67,35.71 27.67,36.46 27.92,36.71 U1.19 | v42.99,26.41 42.99,23.65 43.74,22.89 46.76,22.89 49.27,25.41 50.28,25.41 51.03,24.65 51.03,23.65 50.28,22.89 49.27,22.89 37.46,11.09 25.41,11.09 22.39,8.07 20.63,8.07 U2.21 | v19.13,9.33 18.62,9.83
  Bottom 0.35: v27.67,35.71 33.7,35.71 v42.99,26.41 | v19.13,9.33 20.38,8.07 U2.21
SDA  (via drill 0.35)  (1 unrouted)
  Top 0.35: v30.18,31.44 30.18,35.2 27.92,37.46 27.67,37.21 27.42,37.21 U1.20 | v22.14,23.15 21.39,23.9 R2.2 | v14.61,23.15 15.36,22.39 R6.1 | v10.84,20.13 10.84,22.89 10.33,23.4 10.33,24.65 v12.85,27.17
  Bottom 0.35: v30.18,31.44 30.18,29.68 26.16,25.66 26.16,24.4 24.9,23.15 v22.14,23.15 v14.61,23.15 14.61,26.16 13.6,27.17 v12.85,27.17 | v10.84,20.13 10.08,19.38 10.08,16.87 11.84,15.11 11.84,9.33 14.61,6.57 15.36,6.57 18.88,10.08 19.38,10.08 19.63,9.83 22.14,9.83 U2.22
SWCLK_BNO055  (via drill 0.35)
  Top 0.35: v21.14,28.92 22.39,30.18 25.66,30.18 27.42,31.94 27.42,32.19 27.17,32.44 U1.8 | v12.85,28.17 8.83,24.15 8.83,23.15 6.57,20.89 6.57,20.13 8.58,18.12 11.09,18.12 11.59,17.62 11.59,16.87 10.08,15.36 10.08,13.85 JP2.1
  Bottom 0.35: v21.14,28.92 17.87,28.92 17.12,28.17 16.11,28.17 15.36,28.92 13.6,28.92 v12.85,28.17
SWDIO_BNO055  (1 unrouted)
TRIG_CHARGE_1  (via drill 0.35)
  Top 0.35: v19.63,43.24 17.62,43.24 R17.2 | v32.69,44.25 33.19,44.25 36.46,47.51 36.46,49.02 U2.4
  Bottom 0.35: v19.63,43.24 28.42,43.24 30.18,45 31.94,45 v32.69,44.25
TRIG_CHARGE_2  (via drill 0.35)
  Top 0.35: v19.63,48.77 20.13,49.27 20.89,49.27 22.14,50.53 R20.2 | v26.66,45 28.42,45 30.68,47.26 34.7,47.26 U2.5
  Bottom 0.35: v19.63,48.77 22.89,48.77 v26.66,45
TX_GPS
  Bottom 0.35: J1.2 45.25,25.41 45.25,27.92 31.18,41.99 31.18,43.74 U2.7
VCC_3_3  (via drill 0.35)
  Top 0.35: R11.2 26.66,48.77 27.67,48.77 R12.2 27.92,48.77 28.67,49.52 | v13.1,54.04 13.1,53.04 Q2.1 | v15.36,54.04 16.36,53.04 Q1.1 16.61,53.04 17.37,53.79 19.13,53.79 19.88,53.04 Q3.1 20.13,53.04 20.89,53.79 22.64,53.79 23.9,52.54 23.9,52.29 | 23.9,52.29 23.9,51.53 R7.2 | 28.67,49.52 28.67,51.78 28.17,52.29 23.9,52.29 | JP5.6 52.54,19.38 52.54,21.64 JP5.4 | 28.67,49.52 30.68,49.52 v31.69,48.52
  Bottom 0.35: v15.36,54.04 v13.1,54.04 | 48.27,23.9 48.52,23.9 49.52,22.89 51.28,22.89 52.29,21.89 JP5.4 | 48.27,23.9 44.25,23.9 J1.3 | 48.27,23.9 48.27,26.91 47.51,27.67 47.51,34.7 U2.36 47.26,34.95 43.24,34.95 41.99,36.21 41.99,38.22 v31.69,48.52
VCC_3_3_BMP390L  (via drill 0.35)  (1 unrouted)
  Top 0.35: v16.36,25.41 15.11,25.41 13.85,24.15 13.85,22.14 14.86,21.14 16.11,21.14 16.87,20.38 C4.1 | v42.74,36.46 v35.71,36.46 | v47.26,36.46 51.28,32.44 51.28,29.17 53.54,26.91 53.54,23.65 52.79,22.89 52.03,22.89 51.03,21.89 51.03,20.38 50.02,19.38 JP5.5
  Bottom 0.35: v16.36,25.41 21.64,25.41 24.4,28.17 25.16,28.17 25.66,28.67 25.66,29.68 20.89,34.45 20.89,35.2 21.64,35.96 22.89,35.96 23.4,35.45 26.41,35.45 27.42,36.46 v35.71,36.46 | v47.26,36.46 v42.74,36.46
VCC_3_3_BNO055  (via drill 0.35)  (1 unrouted)
  Top 0.35: 19.63,22.14 19.63,23.65 R2.1 19.38,23.9 21.14,25.66 R1.2 21.39,25.66 v22.14,24.9 | 19.63,22.14 21.14,20.63 21.14,20.13 R4.2 | 19.63,22.14 R3.1 | C3.1 23.9,20.13 25.41,21.64 C2.2 25.41,21.89 v25.41,24.65 | v23.65,34.7 24.15,34.7 24.4,34.45 U1.28
  Bottom 0.35: 26.91,34.7 31.44,34.7 42.49,23.65 42.99,23.65 44.75,21.89 49.77,21.89 JP5.3 | 26.91,34.7 v23.65,34.7 | 25.41,24.9 25.41,26.16 26.91,27.67 26.91,34.7 | 25.41,24.9 v22.14,24.9 | 25.41,24.9 v25.41,24.65
VCC_5  (via drill 0.35)  (1 unrouted)
  Top 0.35: v16.87,32.69 16.61,32.94 16.61,33.7 U8.5 | v25.41,30.93 v23.4,30.93 | C10.2 25.66,26.66 25.66,27.42 v26.16,27.92 26.41,27.92 27.17,27.17 | 27.17,27.17 27.17,26.66 C9.2 27.17,27.17 | 28.92,27.42 28.67,27.67 27.67,27.67 27.17,27.17 | 28.92,27.42 29.17,27.17 29.17,26.66 C8.2 | R14.1 19.63,17.87 19.63,16.87 21.64,14.86 21.64,14.35 17.62,10.33 13.85,10.33 JP1.3 | 50.28,29.43 52.29,27.42 52.29,24.4 JP5.2 | 50.28,29.43 49.02,30.68 U6.2 | R8.2 25.41,51.28 26.41,51.28 R9.2 26.66,51.53 v27.92,51.53 | 18.88,55.8 19.38,55.8 20.13,56.56 U4.2 | 18.88,55.8 18.62,55.8 18.12,56.3 18.12,56.56 U3.2 | 22.89,55.55 23.15,55.3 23.15,54.8 22.64,54.29 20.38,54.29 18.88,55.8 | 22.89,55.55 22.64,55.8 22.64,56.56 U5.2 | v24.9,55.8 24.9,56.56 U7.2 | 22.89,55.55 v23.15,55.8 | v28.67,47.76 25.91,47.76 25.41,48.27 25.41,48.52 R10.2 | v29.43,27.92 28.92,27.42 | v37.21,27.92 38.72,27.92 39.73,28.92 40.73,28.92 41.48,28.17 49.02,28.17 50.28,29.43
  Bottom 0.35: v16.87,32.69 19.13,32.69 20.89,30.93 v23.4,30.93 | v25.41,30.93 26.16,30.18 v26.16,27.92 | v23.15,55.8 24.65,55.8 | 28.67,49.77 28.67,51.78 28.42,52.03 | 28.67,49.77 v28.67,47.76 | 24.65,55.8 28.42,52.03 | 24.65,55.8 v24.9,55.8 | 28.42,52.03 v27.92,51.53 | 28.67,49.77 34.2,49.77 35.96,48.01 36.71,48.01 48.01,36.71 48.01,35.96 48.52,35.45 48.52,28.92 52.29,25.16 52.29,24.4 JP5.2 52.54,24.15 53.54,23.15 53.54,21.14 52.79,20.38 52.03,20.38 51.28,19.63 51.28,16.11 52.03,15.36 52.79,15.36 53.54,14.61 53.54,13.6 52.79,12.85 52.03,12.85 51.28,12.09 51.28,11.34 46.76,6.82 44.25,6.82 39.98,11.09 29.93,11.09 29.17,10.33 23.4,10.33 22.89,10.84 18.88,10.84 18.37,10.33 13.85,10.33 JP1.3 | v37.21,27.92 v29.43,27.92
VCC_5_ELRS
  Top 0.35: J2.3 36.96,16.87 42.49,16.87 49.77,24.15 JP5.1
VCC_CHARGES
  Top 0.35: JP5.9 50.02,14.1 52.29,14.1 JP5.10 | JP3.1 3.55,23.65 6.82,23.65 JP4.1
  Bottom 0.35: JP5.9 49.77,13.85 46.01,13.85 45,12.85 27.92,12.85 19.88,20.89 9.33,20.89 7.07,23.15 7.07,23.65 JP4.1
VCC_IN  (via drill 0.35)  (2 unrouted)
  Top 0.35: U8.11 16.11,36.46 16.61,36.46 U8.10 | v15.86,32.69 15.61,32.94 15.11,32.94 14.61,33.45 14.61,33.7 U8.1 | C7.2 28.92,20.89 28.92,22.89 C6.2 28.92,23.15 30.18,24.4 30.18,28.17 29.43,28.92 v24.9,28.92 22.89,26.91 22.89,12.09 18.62,7.82 | 18.62,7.82 17.37,6.57 JP1.1 | JP5.7 50.02,16.61 52.29,16.61 JP5.8 | 18.62,7.82 22.14,4.31 40.98,4.31 44.5,7.82 J3.2
  Bottom 0.35: v15.86,32.69 15.86,32.19 18.37,29.68 24.15,29.68 v24.9,28.92 | J3.2 44.75,8.07 49.52,12.85 50.28,12.85 51.03,13.6 51.03,15.36 50.02,16.36 JP5.7 | U2.39 52.54,39.98 52.54,33.7 51.28,32.44 51.28,26.91 54.04,24.15 54.04,18.12 52.54,16.61 JP5.8
VCC_IN_CHARGES
  Top 0.35: J4.2 44.75,13.85 47.51,13.85 49.77,11.59 JP5.11 50.02,11.59 52.29,11.59 JP5.12